# Allegro board board2Vmince.brd
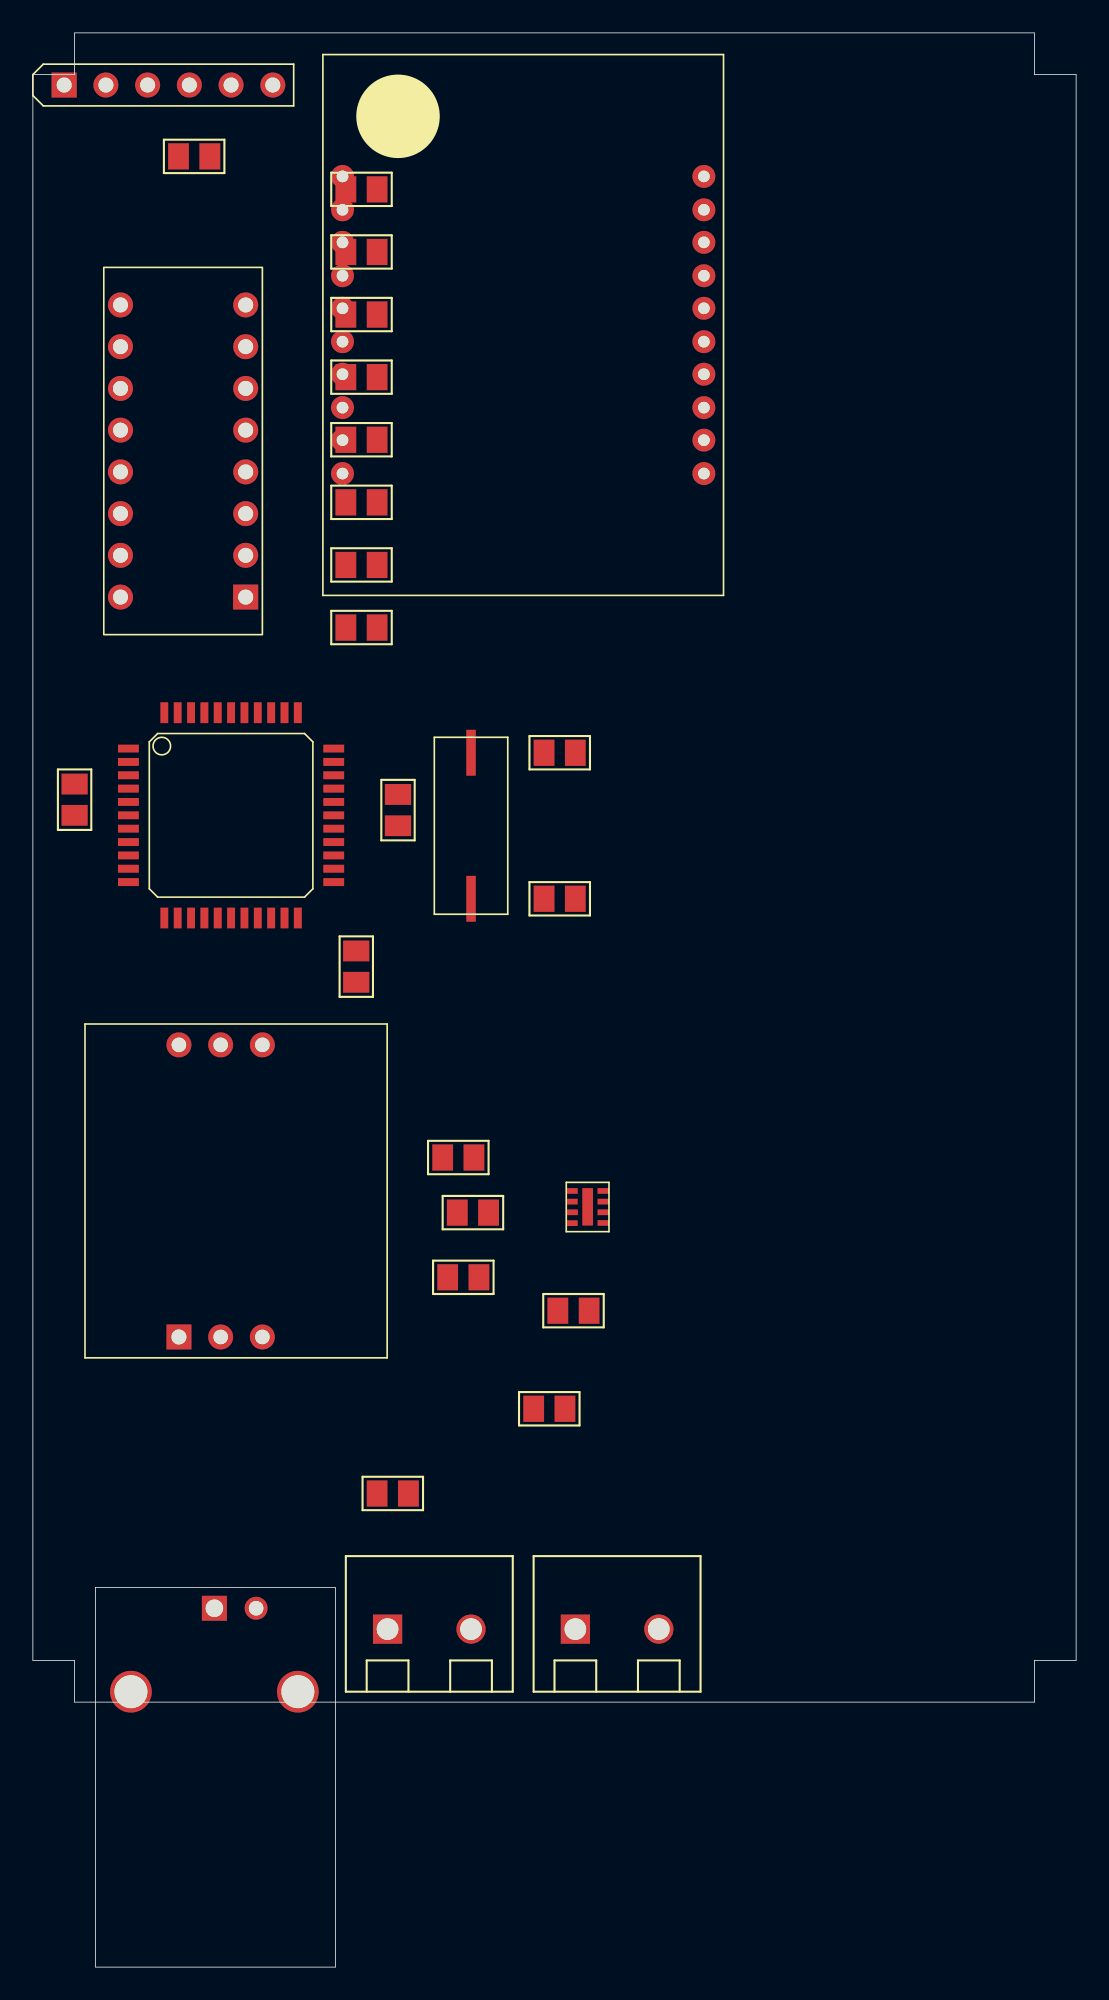
[diagram p0: board, top side]
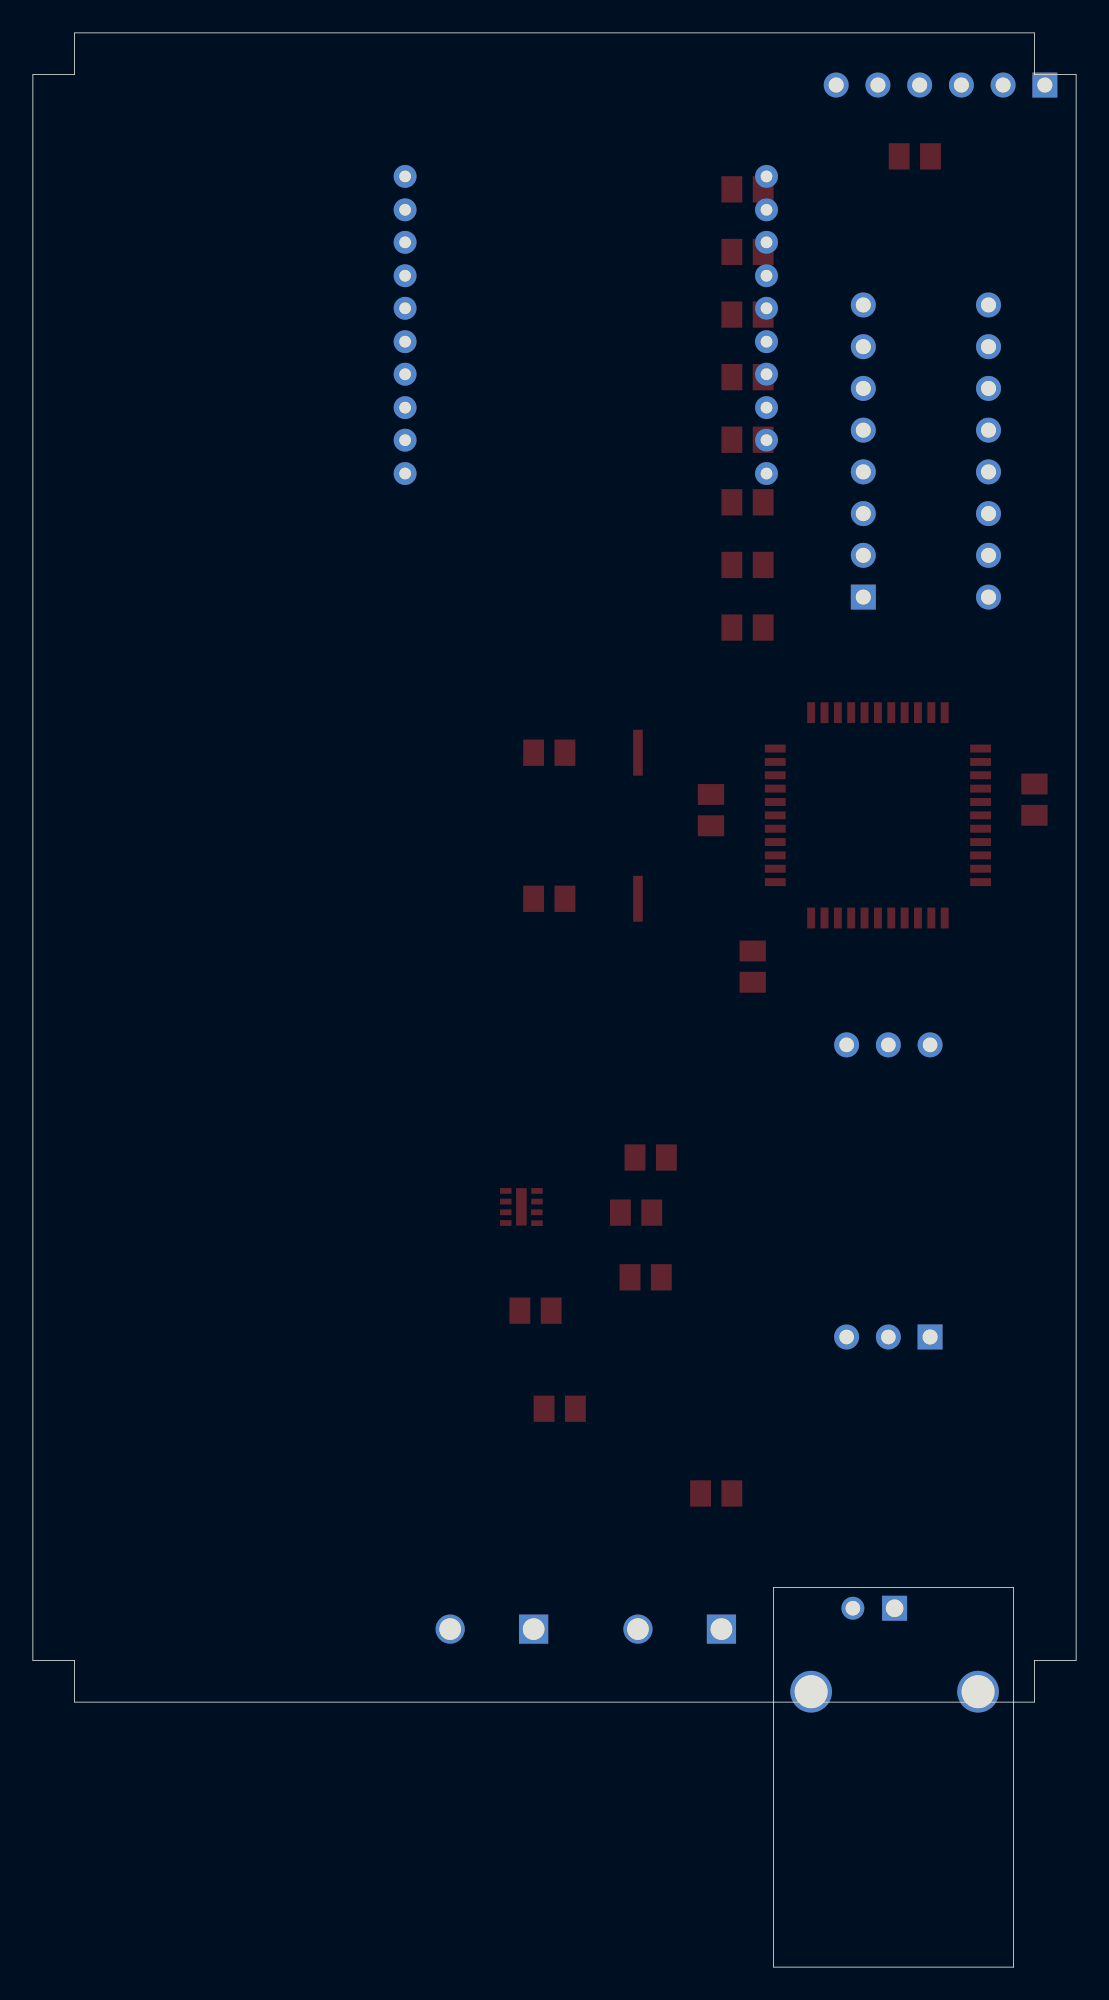
[diagram p1: board, bottom side, seen from below]

Outline 63.5 x 117.73 mm; copper layers: TOP, BOTTOM. Coordinates in mm from the lower left corner of the outline.
Outline path: 0,115.19 2.54,115.19 2.54,117.73 60.96,117.73 60.96,115.19 63.5,115.19 63.5,18.67 60.96,18.67 60.96,16.13 2.54,16.13 2.54,18.67 0,18.67 0,115.19

## Placement (name value [footprint] x y rotation side)
C1  10.0uF  [C_0805]  24.94 49.28 0 top
C2  10.0uF  [C_0805]  25.83 45.92 0 top
C3  470pF  [C_0805]  25.25 41.99 0 top
C4  27pF  [C_0805]  33.02 65.02 180 top
C5  27pF  [C_0805]  33.02 73.91 180 top
C6  10uF  [C_0805]  19.69 61.85 270 top
C7  0.1 uF  [C_0805]  22.23 69.47 90 top
C8  0.1 uF  [C_0805]  2.54 70.1 90 top
J1  Convertion Board  [CONDUCTIVITY_SENSOR]  3.17 37.08 90 top
J2  BNC au capteur  [CONNECTEUR_BNC]  3.81 23.11 270 top
J3  Xbee  [XBEE]  29.84 99.95 0 top
J4  Connecteur PicKit  [SIP6]  1.91 114.55 90 top
J5  HEADER 2  [CONNECTEUR_2_200]  33.02 20.57 0 top
J6  contact eau  [CONNECTEUR_2_200]  21.59 20.57 0 top
R1  80.6k  [R_0805]  31.95 39.95 0 top
R2  69.8k  [R_0805]  30.48 33.99 0 top
R3  4.7K  [R_0805]  10.77 110.21 180 top
R4  10K  [R_0805]  19.05 81.53 0 top
R5  10K  [R_0805]  19.05 85.34 0 top
R6  10K  [R_0805]  19.05 89.15 0 top
R7  10K  [R_0805]  19.05 92.96 0 top
R8  10K  [R_0805]  19.05 96.77 0 top
R9  10K  [R_0805]  19.05 100.58 0 top
R10  10K  [R_0805]  19.05 104.39 0 top
R11  10K  [R_0805]  19.05 108.2 0 top
R12  10K  [R_0805]  22.86 28.83 180 top
SW1  SW DIP-8  [DIPSWITCH]  12.95 83.39 180 top
U1  LM104/TO  [LMZ10500_2]  32.82 47.24 0 top
U2  PIC18F47J13  [PQFP44]  12.06 70.1 0 top
Y1  4Mhz CRYSTAL  [CRYSTAL_SMD]  26.67 69.47 270 top

## Library data of the parts
C1-C3 = C
C4-C6 = CAPACITOR NON-POL
C7 C8 = CAP NP
J1 = HEADER 3X2_1
J2 = BNC
J3 = HEADER 11X2_1
J4 = HEADER 6_0: User Part Number: ***
J5 J6 = HEADER 2
R1 R2 = r
R3 = RESISTOR
R4-R12 = R
SW1 = SW DIP-8: User Part Number: ***
U1 = LM104/TO_1
U2 = PIC16C67_1: Tolerance: ***; User Part Number: ***
Y1 = CRYSTAL

## Footprints (pads in the part's own frame, mm; a bottom-side part is the same pattern mirrored in y, then rotated)
C_0805
  rect 1.27x1.6 smd: 1(0,0) 2(1.905,0)
CONDUCTIVITY_SENSOR
  rect 1.524x1.524 hole 0.914: 1(1.27,-5.715)
  round 1.524 hole 0.889: 2(1.27,-8.255) 3(1.27,-10.795) 4(19.05,-10.795) 5(19.05,-8.255) 6(19.05,-5.715)
CONNECTEUR_2_200
  rect 1.778x1.778 hole 1.321: 1(0,0)
  round 1.778 hole 1.321: 2(5.08,0)
CONNECTEUR_BNC
  round 2.54 hole 2.007: (6.35,12.319) (6.35,2.159)
  rect 1.524x1.524 hole 1.067: 1(1.27,7.239)
  round 1.397 hole 0.889: 2(1.27,9.779)
CRYSTAL_SMD
  rect 2.794x0.584 smd: 1(-4.445,0) 2(4.445,0)
DIPSWITCH
  rect 1.524x1.524 hole 0.914: 1(0,0)
  round 1.524 hole 0.914: 2(0,-2.54) 3(0,-5.08) 4(0,-7.62) 5(0,-10.16) 6(0,-12.7) 7(0,-15.24) 8(0,-17.78) 9(7.62,-17.78) 10(7.62,-15.24) 11(7.62,-12.7) 12(7.62,-10.16) 13(7.62,-7.62) 14(7.62,-5.08) 15(7.62,-2.54) 16(7.62,0)
LMZ10500_2
  rect 0.7x0.35 smd: 1(0,0) 2(0,-0.65) 3(0.01,-1.3) 4(0,-1.96) 5(1.9,-1.95) 6(1.9,-1.3) 7(1.9,-0.65) 8(1.9,0)
  rect 0.65x2.28 smd: 9(0.95,-0.97)
PQFP44
  rect 1.27x0.483 smd: 1(-6.248,4.064) 2(-6.248,3.251) 3(-6.248,2.438) 4(-6.248,1.626) 5(-6.248,0.813) 6(-6.248,0) 7(-6.248,-0.813) 8(-6.248,-1.626) 9(-6.248,-2.438) 10(-6.248,-3.251) 11(-6.248,-4.064) 23(6.248,-4.064) 24(6.248,-3.251) 25(6.248,-2.438) 26(6.248,-1.626) 27(6.248,-0.813) 28(6.248,0) 29(6.248,0.813) 30(6.248,1.626) 31(6.248,2.438) 32(6.248,3.251) 33(6.248,4.064)
  rect 0.483x1.27 smd: 12(-4.064,-6.248) 13(-3.251,-6.248) 14(-2.438,-6.248) 15(-1.626,-6.248) 16(-0.813,-6.248) 17(0,-6.248) 18(0.813,-6.248) 19(1.626,-6.248) 20(2.438,-6.248) 21(3.251,-6.248) 22(4.064,-6.248) 34(4.064,6.248) 35(3.251,6.248) 36(2.438,6.248) 37(1.626,6.248) 38(0.813,6.248) 39(0,6.248) 40(-0.813,6.248) 41(-1.626,6.248) 42(-2.438,6.248) 43(-3.251,6.248) 44(-4.064,6.248)
R_0805
  rect 1.27x1.6 smd: 1(0,0) 2(1.905,0)
SIP6
  rect 1.524x1.524 hole 0.914: 1(0,0)
  round 1.524 hole 0.914: 2(0,-2.54) 3(0,-5.08) 4(0,-7.62) 5(0,-10.16) 6(0,-12.7)
XBEE
  round 1.397 hole 0.711: 1(-10.998,9.042) 2(-10.998,7.01) 3(-10.998,5.029) 4(-10.998,2.997) 5(-10.998,1.016) 6(-10.998,-1.016) 7(-10.998,-2.997) 8(-10.998,-5.029) 9(-10.998,-7.01) 10(-10.998,-9.042) 11(10.998,-9.042) 12(10.998,-7.01) 13(10.998,-5.029) 14(10.998,-2.997) 15(10.998,-1.016) 16(10.998,1.016) 17(10.998,2.997) 18(10.998,5.029) 19(10.998,7.01) 20(10.998,9.042)

## Nets
3.3V: C2.2 C7.1 C8.1 J1.1 J3.2 J4.2 R3.1 R4.2 R5.2 R6.2 R7.2 R8.2 R9.2 R10.2 R11.2 R12.1 U1.3(FB) U1.5(VOUT) U2.7(VDD1) U2.22(RA3) U2.28(VDD2)
4.2V: C1.2 J5.1 U1.7(VIN)
GND: C1.1 C2.1 C3.1 C4.1 C5.1 C6.2 C7.2 C8.2 J1.4(GND) J3.1 J3.10 J4.3 J5.2 J6.2 R2.1 SW1.9(B8) SW1.10(B7) SW1.11(B6) SW1.12(B5) SW1.13(B4) SW1.14(B3) SW1.15(B2) SW1.16(B1) U1.4(SGND) U1.6(PGND#6) U1.9(PGND#9) U2.6(VSS1) U2.21(RA2) U2.29(VSS2)
CAPTEURRX: J1.6 U2.14(RB4)
CAPTEURTX: J1.5 U2.15(RB5)
XBEEDIN: J3.4 U2.1(RC7)
XBEEDOUT: J3.3 U2.44(RC6)
XBEERESET: J3.6 U2.36(RC2)
XBEESLEEP: J3.9 U2.25(RE0)
N45185: C6.1 U2.23(VDDCORE)
N45221: J4.5 U2.16(RB6)
N45265: J4.4 U2.17(RB7)
N45305: J4.1 R3.2 U2.18(M\C\L\R\)
N56544: R4.1 SW1.1(A1) U2.5(RD7)
N56546: R5.1 SW1.2(A2) U2.4(RD6)
N56548: R6.1 SW1.3(A3) U2.3(RD5)
N56550: R7.1 SW1.4(A4) U2.2(RD4)
N56552: R8.1 SW1.5(A5) U2.41(RD3)
N56554: R9.1 SW1.6(A6) U2.40(RD2)
N56556: R10.1 SW1.7(A7) U2.39(RD1/SDA2)
N56558: R11.1 SW1.8(A8) U2.38(RD0/SCL2)
N61373: J1.2 J2.1(CENTER)
N61405: J1.3 J2.2(SHIELD)
N73074: R1.2 U1.2(VCON)
N73078: C3.2 R1.1 R2.2 U1.8(VREF)
N78069: C4.2 U2.30(OSC1/RA7) Y1.2
N78169: C5.2 U2.31(OSC2/RA6) Y1.1
N80519: J6.1 R12.2 U2.9(RB1)

Pads without a net: J3 5 7 8 11 12 13 14 15 16 17 18 19 20; J4 6; U1 1; U2 8 10 11 12 13 19 20 24 26 27 32 33 34 35 37 42 43
